# Altium PCB PCB2.PcbDoc
Units mm, origin at the board's own origin, x right, y up, seen from the top; angles counter-clockwise.
Board outline 36.32 x 56.13 mm, 2 copper layers (Top Layer, Bottom Layer); 8 components, 9 nets, 58 pads, 0 vias.
Unrouted connection lines stored in the file: 1.
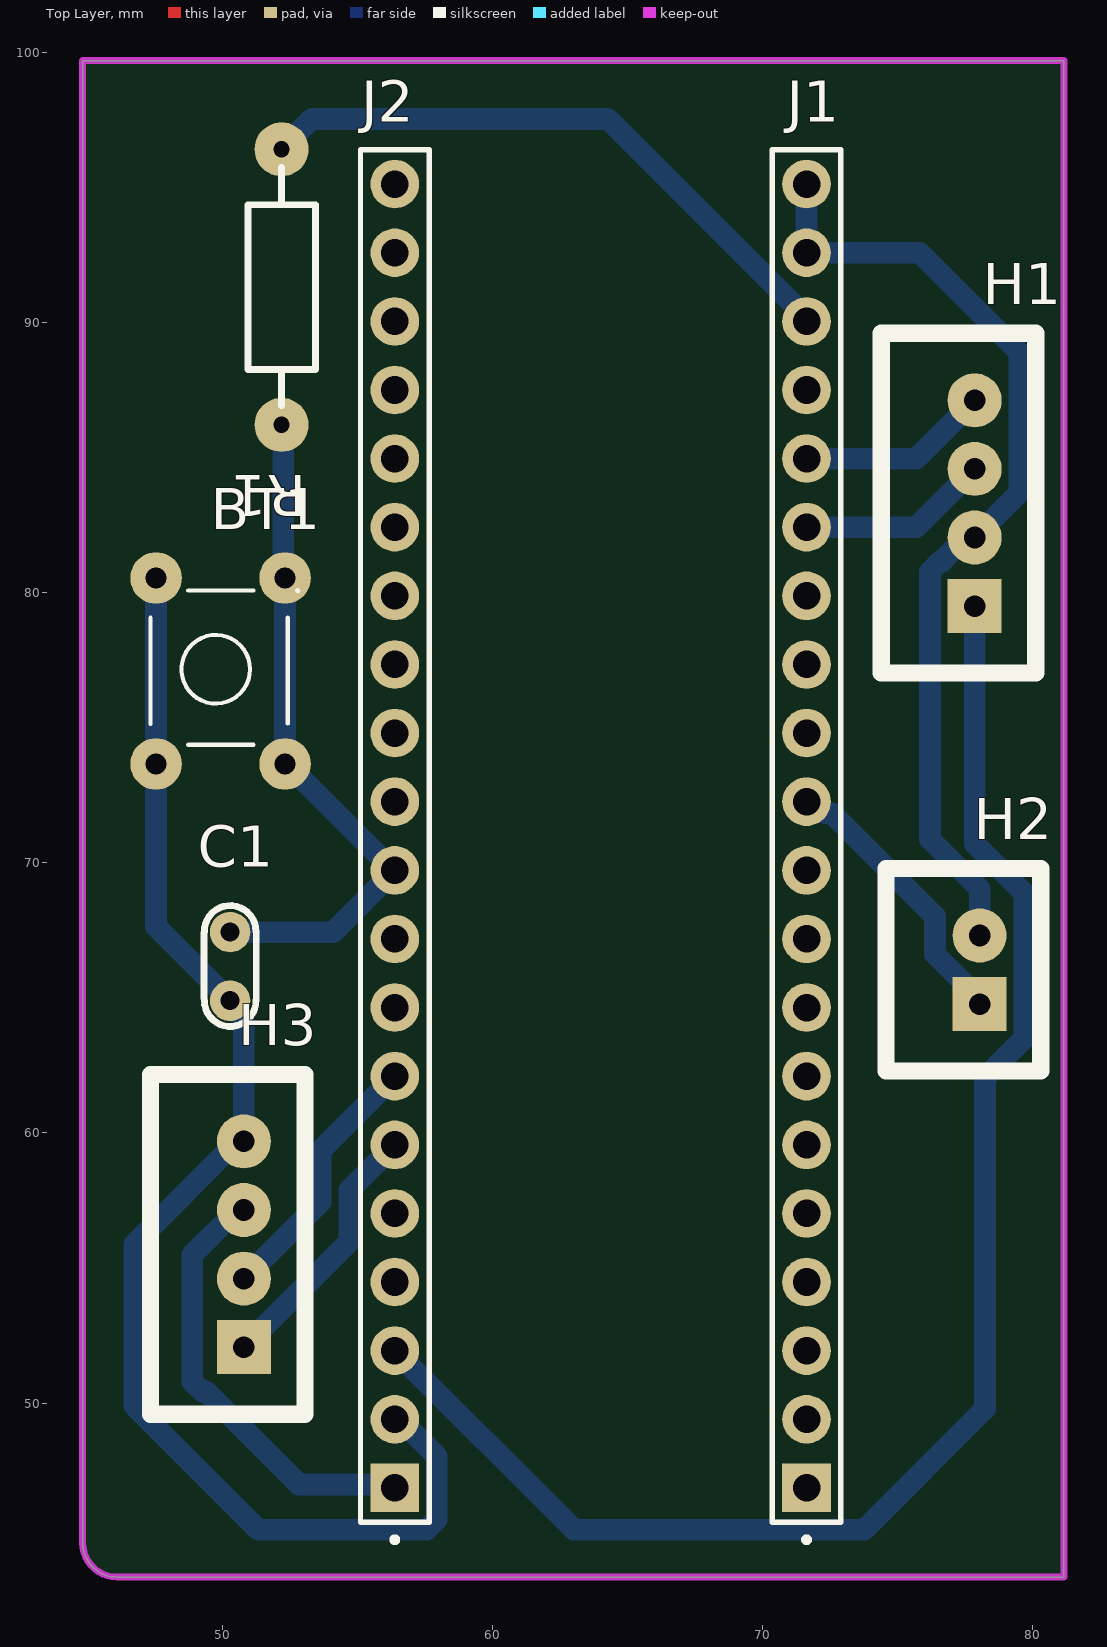
[diagram p0: Top Layer view]
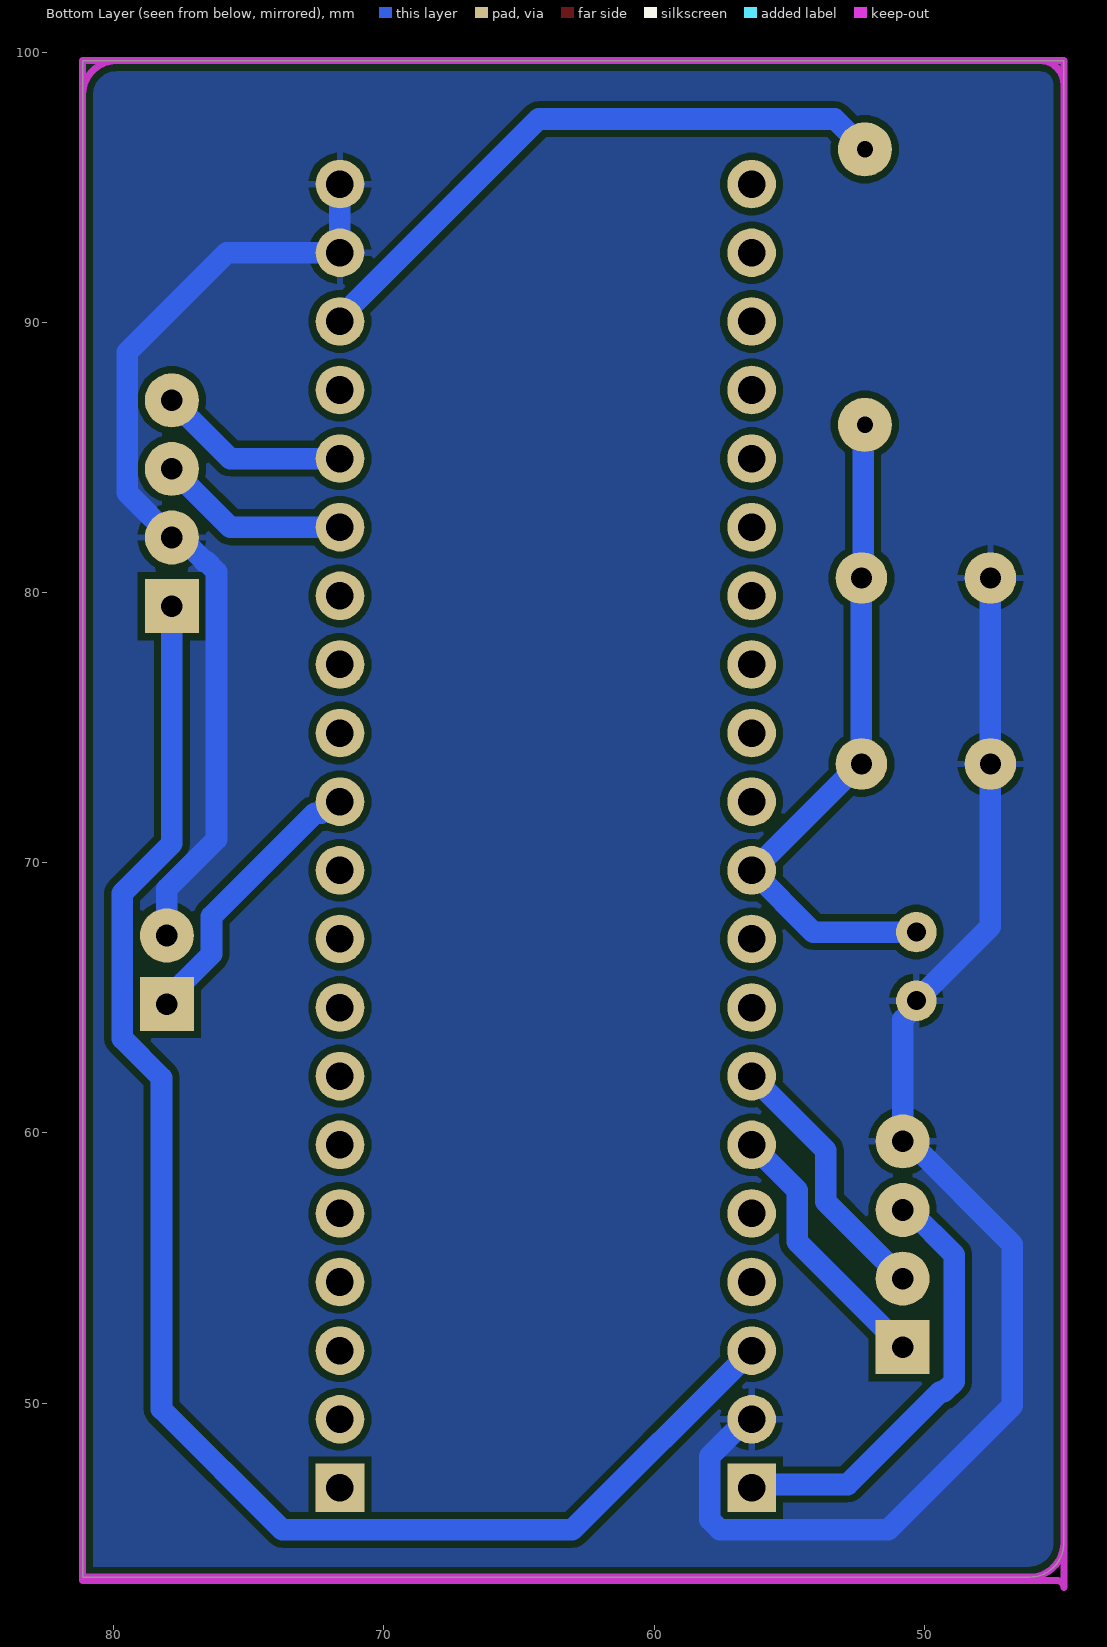
[diagram p1: Bottom Layer view, seen from below]
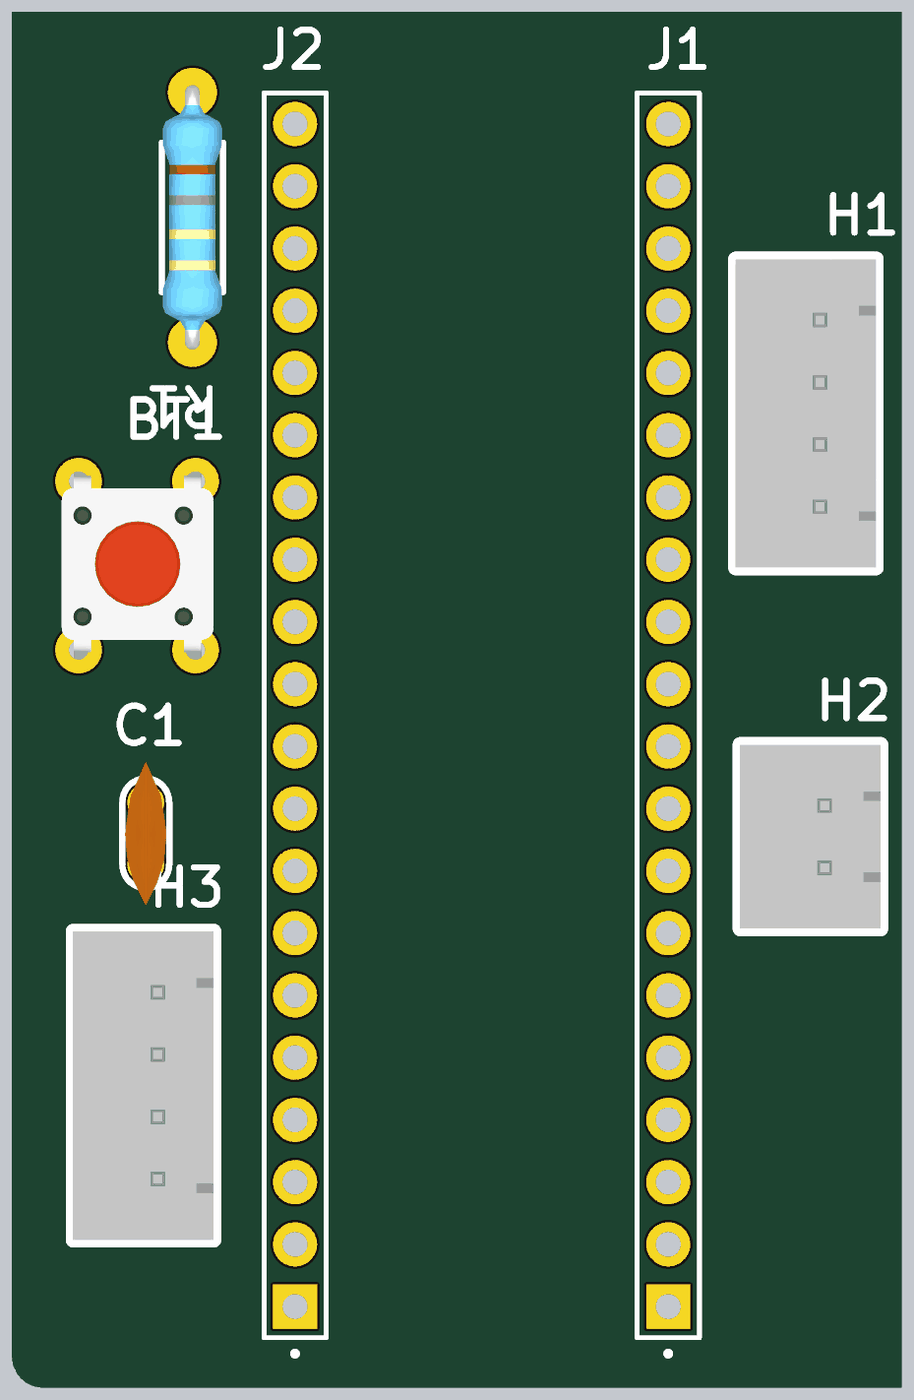
[diagram p2: 3D render of the assembled board from above, using the file's embedded part models]

## Layer stack, top to bottom
Top Solder: solder mask 0.0102, Solder Resist, Dk 3.5
Top Layer: signal copper 0.0356
Dielectric 1: dielectric 0.32, FR-4, Dk 4.8
Bottom Layer: signal copper 0.0356
Bottom Solder: solder mask 0.0102, Solder Resist, Dk 3.5

## Board outline
44.831,44.831 44.831,99.695 81.153,99.695 81.153,43.561 46.101,43.561 cw(c46.101,44.831)

## Design rules (kind name [scope] priority, off if disabled: settings)
Clearance [All] p1: gap=0.254 ignorepadtopadclearanceinfootprint=FALSE
PolygonConnect [All] p1: connectstyle=Relief reliefconductorwidth=0.254 reliefentries=4 polygonreliefangle="90 Angle" airgapwidth=0.254
RoomDefinition Sheet2 [InComponentClass('Sheet2')] p1: confinementstyle=ConfineIn formatcopy=TRUE lockcomponents=FALSE outline 0,0 50.8,0 50.8,25.4 0,25.4
RoutingVias [All] p1: holewidth=0.711 width=1.27 viastyle="Through Hole" minholewidth=0.711 minwidth=1.27 maxholewidth=0.711 maxwidth=1.27
SolderMaskExpansion [All] p1: expansion=0.102 istentingtop=FALSE
Width [All] p1: maxlimit=0.8 minlimit=0.8 preferedwidth=0.8
30 further rules are at their usual default settings.

## Components (designator, comment, footprint, x,y, rotation, side; value= is the part's Value field where it differs from the comment)
BT1 "button" "Nut Nhan 4 Chan Cam 6x6" 47.346,73.99 r90 top
C1 "15pF" "tu gom" 50.292,66.167 r270 top
H1 "Header 4P 2.54 Duc Thang" XH2.54M-4 77.851,79.502 r90 top
H2 "Header 2P 2.54 Duc Thang" XH2.54M-2 78.035,64.77 r90 top
H3 "Header 4P 2.54 Duc Thang" XH2.54M-4 50.8,52.07 r90 top
J1 "TSW-120-08-T-S-LL" SAMTEC_TSW-120-08-T-S-LL 71.628,46.863 r90 top
J2 "TSW-120-08-T-S-LL" SAMTEC_TSW-120-08-T-S-LL 56.388,46.863 r90 top
R1 "4.7k" "tro vach 1/4w" 52.197,91.313 r90 top

## Footprints (in the part's own frame and the unit in brackets; to place one, negate y for a bottom-side part, rotate by r counter-clockwise, add the part's x,y. Pads: shape width x height; smd on the part's side, far side on the other; paste and mask are expansions set on the pad)
"Nut Nhan 4 Chan Cam 6x6" [mil] "SW button 4pin, 250 x250 mil"
  round 75 hole 31: 1(-13,-8) 1(258,-8) 2(-13,-196) 2(258,-196)
  silkscreen extent 15,-215 240,0, body extent -31,-225 281,19, height 276
SAMTEC_TSW-120-08-T-S-LL [mm]
  rect 1.8x1.8 hole 1.02 paste+0: 01(0,0)
  round 1.8 hole 1.02 paste+0: 02(2.54,0) 03(5.08,0) 04(7.62,0) 05(10.16,0) 06(12.7,0) 07(15.24,0) 08(17.78,0) 09(20.32,0) 10(22.86,0) 11(25.4,0) 12(27.94,0) 13(30.48,0) 14(33.02,0) 15(35.56,0) 16(38.1,0) 17(40.64,0) 18(43.18,0) 19(45.72,0) 20(48.26,0)
  silkscreen extent -2.02,-1.27 49.53,1.27
"tro vach 1/4w" [mm]
  round 2 hole 0.6 paste+0: 1(-5.1,0) 2(5.1,0)
  silkscreen extent -4.39,-1.25 4.42,1.25, body extent -5.38,-1.2 5.38,1.2, height 2.41
"tu gom" [mm] "Tu gom mini"
  round 1.5 hole 0.7 paste+0: 1(-1.27,0) 2(1.27,0)
  silkscreen extent -2.25,-0.97 2.22,0.97, body extent -2.92,-0.85 2.92,0.85, height 6.12
XH2.54M-2 [mm]
  rect 2x2 hole 0.8 paste+0: 1(0,0)
  round 2 hole 0.8 paste+0: 2(2.54,0)
  silkscreen extent -2.48,-2.26 5.02,3.46, body extent -2.48,-2.26 5.02,3.48, height 6.91
XH2.54M-4 [mm]
  rect 2x2 hole 0.8 paste+0: 1(0,0)
  round 2 hole 0.8 paste+0: 2(2.54,0) 3(5.08,0) 4(7.62,0)
  silkscreen extent -2.48,-2.26 10.1,3.46, body extent -2.48,-2.26 10.1,3.48, height 6.91

## Part data
BT1: library part "Nut Nhan 4 Chan Cam 6x6", "Nut Nhan 4 Chan 6x6mm", Ma_Hang=MH004584, Ten="NÃºt Nháº¥n 4 ChÃ¢n 6x6x5MM DIP"
C1: library part "Tu gom 15pF 50V", "Cáº¯m", Chung_Loai=Cáº¯m, Don_Vi=Con, Ma_Hang=MH004767, So_Chan=2, Ten_Linh_Kien="Tá»¥ gá»‘m 15P 50V"
H1 H2 H3: "Cáº¯m", Chung_Loai=Cáº¯m, Don_Vi=Con
  H1 H3: Ma_Hang=MH001285, Ten_Linh_Kien="Header 4P XH2.54-4P Äá»±c Tháº³ng"
  H2: Ma_Hang=MH001283, Ten_Linh_Kien="Header 2P XH2.54-2P Äá»±c Tháº³ng"
J1 J2: Package=None, Availability=Unavailable, MP=TSW-120-08-T-S-LL, Price=None
R1: library part "Tro Vach 1/4W 5% 4.7k", "Cáº¯m", Chung_Loai=Cáº¯m, Don_Vi=Con, Ma_Hang=MH007317, So_Chan=2, Ten_Linh_Kien="Trá»Ÿ Váº¡ch 1/4w 5% 4.7k"

## Nets (pads, with @x,y where several pads share a name; then routed paths per layer and width w, separated by ;. In a path a pad name is that pad's centre, name@x,y a point inside that pad or via, vN(x,y) a via of type N, cw(c..) or ccw(c..) an arc to the next point about the centre after c; other vN are vias at no path point)
3.3V: H3.3 J1.18 J2.01 R1.2 | length 39.5
  Bottom Layer w0.8: H3.3 50.546,57.15 48.892,55.496 48.892,50.799 49.275,50.416 49.406,50.416 52.832,46.99 56.261,46.99 J2.01 ; R1.2 53.32,97.536 64.262,97.536 71.628,90.17 J1.18
5V: H1.1 J2.03 | length 57.5
  Bottom Layer w0.8: J2.03 63.022,45.309 73.757,45.309 78.232,49.784 78.232,62.042 79.689,63.499 79.689,68.868 77.851,70.706 H1.1
GND: BT1.1 C1.2 H1.2 H2.2 H3.4 J1.19 J1.20 J2.02 | length 87.4
  Bottom Layer w0.8: BT1.1@47.549,80.543 47.549,73.66 47.549,67.64 50.419,64.77 50.419,64.581 50.8,64.2 H3.4 50.546,59.69 46.736,55.88 46.736,49.911 51.338,45.309 57.559,45.309 57.942,45.692 57.942,48.034 56.573,49.403 J2.02 ; J1.20 J1.19 75.819,92.583 79.505,88.897 79.505,83.696 H1.2 77.526,82.042 76.64,81.156 76.58,81.156 76.197,80.773 76.197,70.869 78.035,69.031 H2.2
PA6: H2.1 J1.11 | length 10.4
  Bottom Layer w0.8: J1.11 71.899,72.263 72.33,71.832 72.567,71.832 76.381,68.018 76.381,66.625 77.435,65.571 77.435,65.37 H2.1
PB3: BT1.2 C1.1 J2.10 R1.1 | length 25.3
  Bottom Layer w0.8: C1.1 54.102,67.437 J2.10 56.325,69.723 52.387,73.66 52.324,73.66 52.324,80.543 52.261,80.607 52.261,86.149 R1.1
PB10_SCL: H1.3 J1.15 | length 7.1
  Bottom Layer w0.8: J1.15 75.692,82.423 H1.3
PB11_SDA: H1.4 J1.16 | length 7.1
  Bottom Layer w0.8: J1.16 75.692,84.963 H1.4
SCL: H3.1 J2.06 | length 9.8
  Bottom Layer w0.8: H3.1 54.698,55.968 54.698,57.873 J2.06
SDA: H3.2 J2.07 | length 9.8
  Bottom Layer w0.8: H3.2 53.644,57.454 53.644,59.359 J2.07
pads on no net: J1.01 J1.02 J1.03 J1.04 J1.05 J1.06 J1.07 J1.08 J1.09 J1.10 J1.12 J1.13 J1.14 J1.17 J2.04 J2.05 J2.08 J2.09 J2.11 J2.12 J2.13 J2.14 J2.15 J2.16 J2.17 J2.18 J2.19 J2.20

## Polygon pours and split planes (outlines as drawn)
GND on Bottom Layer "GND_L02_P000" (solid, pour order 0): 44.704,99.695 44.831,99.568 44.831,43.688 45.085,43.434 81.153,43.434 81.153,99.695

## Keep-outs
Bottom Layer:
  lines w0.254: 44.831,43.18 cw(c45.085,43.18) 45.085,43.434 81.153,43.434 81.153,98.425 ccw(c79.883,98.425) 79.883,99.695 45.72,99.695 ccw(c45.72,98.806) 44.831,98.806 44.831,43.18
Keep-Out Layer:
  the board outline again, w0.254